# Altium PCB 窗帘机器人.PcbDoc
Units mm, origin at the board's own origin, x right, y up, seen from the top; angles counter-clockwise.
Board outline 82.23 x 28.09 mm, 2 copper layers (Top Layer, Bottom Layer); 57 components, 40 nets, 176 pads, 136 vias.
Unrouted connection lines stored in the file: 1.
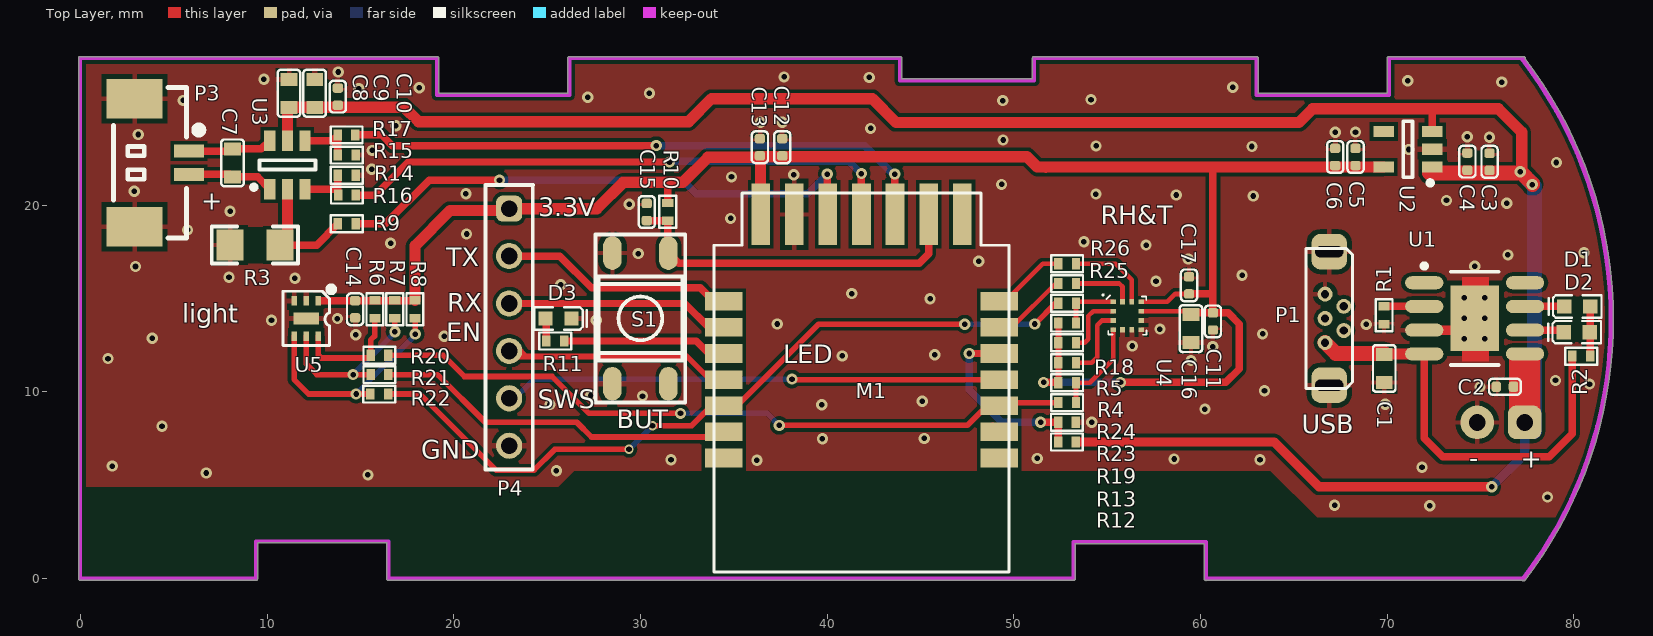
[diagram p0: Top Layer view]
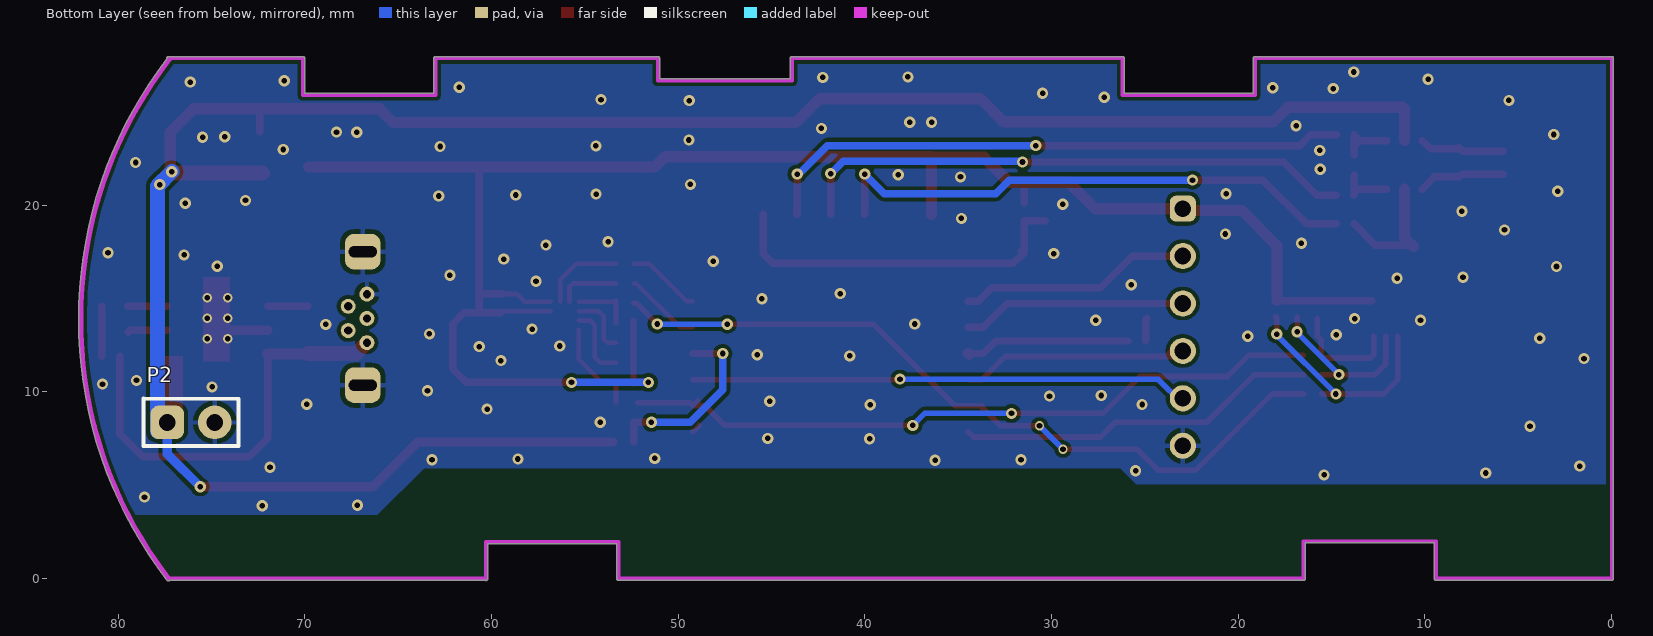
[diagram p1: Bottom Layer view, seen from below]
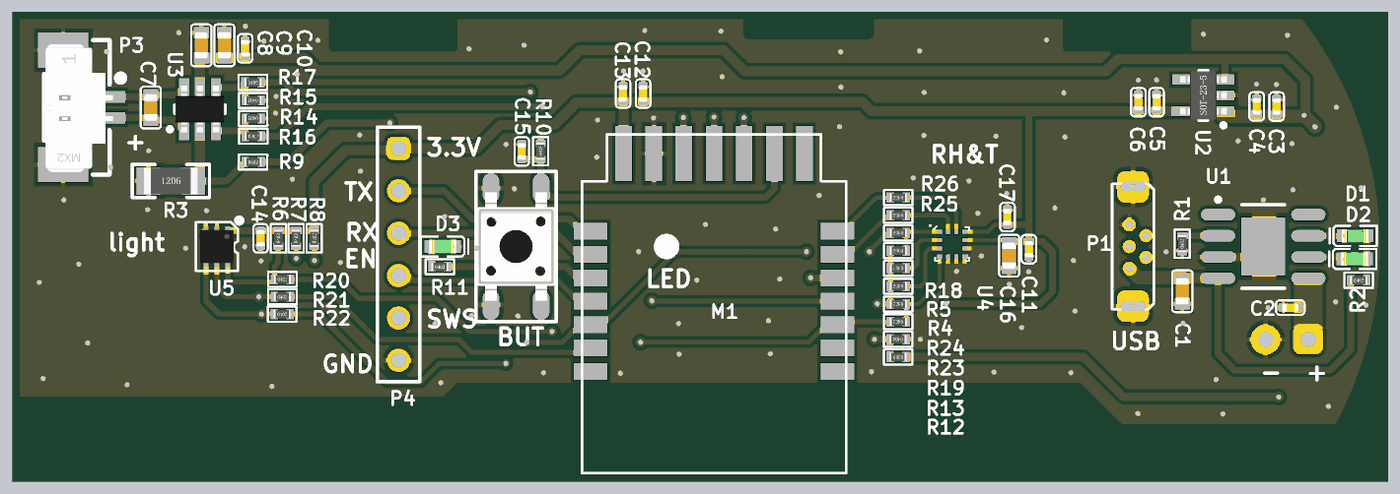
[diagram p2: 3D render of the assembled board from above, using the file's embedded part models]

## Layer stack, top to bottom
Top Solder: solder mask 0.0102, Solder Resist, Dk 3.5
Top Layer: signal copper 0.0356
Dielectric 1: dielectric 0.32, FR-4, Dk 4.8
Bottom Layer: signal copper 0.0356
Bottom Solder: solder mask 0.0102, Solder Resist, Dk 3.5

## Board outline
0,-0.1 cw(c0,0) -0.1,0 -0.1,27.86 cw(c0,27.86) 0,27.96 19.1,27.96 cw(c19.1,27.86) 19.2,27.86 19.2,26 26.1,26 26.1,27.86 cw(c26.2,27.86) 26.2,27.96 43.9,27.96 cw(c43.9,27.86) 44,27.86 44,26.76 51,26.76 51,27.86 cw(c51.1,27.86) 51.1,27.96 63,27.96 cw(c63,27.86) 63.1,27.86 63.1,26 70,26 70,27.86 cw(c70.1,27.86) 70.1,27.96 77.3,27.96 cw(c77.3,27.86) 77.4,27.86 cw(c77.3,27.86) 77.395,27.828 cw(c59.18,13.87) 82.128,13.87 cw(c59.18,13.87) 77.402,-0.078 cw(c77.301,-0.001) 77.222,-0.1 60.344,-0.1 cw(c60.3,-0.01) 60.2,-0.01 60.2,1.86 53.3,1.86 53.3,0 cw(c53.2,0) 53.2,-0.1 16.5,-0.1 cw(c16.5,0) 16.401,0.015 cw(c16.5,0.03) 16.4,0.03 16.4,1.9 9.5,1.9 9.5,0.04 cw(c9.4,0.04) 9.498,0.02 cw(c9.4,0) 9.5,0 cw(c9.4,0) 9.4,-0.1

## Design rules (kind name [scope] priority, off if disabled: settings)
Clearance [All] p1: gap=0.2
HoleToHoleClearance [All] p1: gap=0.2 allowstackedmicrovias=TRUE
PolygonConnect PolygonConnect_1 [IsVia] p1: connectstyle=Direct reliefconductorwidth=0.254 reliefentries=4 polygonreliefangle="90 Angle" airgapwidth=0.254
PolygonConnect [All] p2: connectstyle=Relief reliefconductorwidth=0.254 reliefentries=4 polygonreliefangle="90 Angle" airgapwidth=0.254
RoutingVias [All] p1: holewidth=0.3 width=0.5 viastyle="Through Hole" minholewidth=0.3 minwidth=0.5 maxholewidth=0.5 maxwidth=1
SilkToSilkClearance [All] p1: silktosilkclearance=0
SilkToSolderMaskClearance [IsPad] p1: minsilkscreentomaskgap=0 clearancetoexposedcopper=TRUE
SolderMaskExpansion [All] p1: expansion=0.051
Width [All] p1: maxlimit=1 minlimit=0.25 preferedwidth=0.254
27 further rules are at their usual default settings.

## Components (designator, comment, footprint, x,y, rotation, side; value= is the part's Value field where it differs from the comment)
C1 "1uF/16V" C0603_GRM18 69.85,11.25 r270 top
C2 "4.7uF/6.3V" C0402_GRM15 76.31,10.27 r0 top
C3 "10uF/6.3V" C0402_GRM15 75.49,22.32 r90 top
C4 "0.1uF/16V" C0402_GRM15 74.3,22.33 r270 top
C5 "10uF/6.3V" C0402_GRM15 68.31,22.58 r90 top
C6 "0.1uF/16V" C0402_GRM15 67.22,22.58 r270 top
C7 "0.1uF/50V" C0603_GRM18 8.15,22.26 r90 top
C8 "10uF/10V" C0603_GRM18 11.17,25.99 r270 top
C9 "10uF/10V" C0603_GRM18 12.55,25.99 r270 top
C10 "0.1uF/16V" C0402_GRM15 13.79,25.81 r270 top
C11 "0.1uF/16V" C0402_GRM15 60.67,13.77 r90 top
C12 "10uF/6.3V" C0402_GRM15 37.6,23.1 r90 top
C13 "0.1uF/16V" C0402_GRM15 36.4,23.1 r270 top
C14 "0.1uF/16V" C0402_GRM15 14.72,14.42 r90 top
C15 "0.1uF/16V" C0402_GRM15 30.34,19.63 r270 top
C16 "10uF/10V" C0603_GRM18 59.49,13.38 r90 top
C17 "0.1uF/16V" C0402_GRM15 59.39,15.7 r270 top
D1 "红光" LED0603 80.19,14.57 r180 top
D2 "绿光" LED0603 80.16,13.19 r180 top
D3 "蓝光" LED0603 25.61,13.93 r0 top
M1 "BTU" CBU-PCBA 41.84,13.55 r180 top
P1 "Value" MICROUSB_180 66.9,13.93 r90 top locked
P2 "电池" HDR1×2_2.54 77.37,8.36 r180 bottom
P3 "1.25T-2PLT" 1.25-2P-LT 4.36,22.27 r270 top
P4 "烧录日志" HDR1×6_2.54 22.97,13.46 r270 top
R1 "1k" R0402 69.84,14.1 r90 top
R2 "3.3K/1%" R0402 80.4,11.91 r0 top
R3 "0.1R" R1206 9.35,17.86 r0 top
R4 "10K" R0402 52.86,12.63 r180 top
R5 "10K" R0402 52.86,13.68 r180 top
R6 "10K" R0402 15.78,14.42 r90 top
R7 "10K" R0402 16.84,14.42 r90 top
R8 "10K" R0402 17.92,14.42 r90 top
R9 "1K/1%" R0402 14.27,19 r0 top
R10 "10K" R0402 31.47,19.64 r90 top
R11 "3.3K/1%" R0402 25.44,12.72 r0 top
R12 "47k/1%" R0402 52.85,7.31 r0 top
R13 "47k/1%" R0402 52.85,8.37 r180 top
R14 "100K" R0402 14.27,21.6 r180 top
R15 "100K" R0402 14.27,22.68 r180 top
R16 "1K/1%" R0402 14.28,20.54 r0 top
R17 "1K/1%" R0402 14.26,23.76 r0 top
R18 "100R" R0402 52.86,14.74 r180 top
R19 "100R" R0402 52.86,9.42 r180 top
R20 "100R" R0402 16.02,11.96 r0 top
R21 "100R" R0402 16.02,10.92 r0 top
R22 "100R" R0402 16.01,9.88 r0 top
R23 "10K" R0402 52.86,10.48 r180 top
R24 "10K" R0402 52.86,11.55 r180 top
R25 "100R" R0402 52.86,15.8 r180 top
R26 "100R" R0402 52.86,16.86 r180 top
S1 "TSTP4560-250BH-6.5（DP)" SW-PB4_SMT_2 30,13.93 r90 top locked
U1 "XT2052" ESOP-8 74.69,13.935 r0 top
U2 "TLV70328DBVR" SOT23-5 71.11,22.99 r180 top
U3 "HT7K1201" SOT23-6 11.09,22.16 r90 top
U4 "LIS2DW12" LGA-12 56.08,14.07 r0 top
U5 "OPT3004" QFN-7 12.1,13.93 r270 top locked

## Footprints (in the part's own frame and the unit in brackets; to place one, negate y for a bottom-side part, rotate by r counter-clockwise, add the part's x,y. Pads: shape width x height; smd on the part's side, far side on the other; paste and mask are expansions set on the pad)
1.25-2P-LT [mm]
  rect 0.7x1.6 smd: 1(-0.625,1.45) 2(0.625,1.45)
  rect 2.1x3 smd: S1(-3.425,-1.45) S2(3.425,-1.45)
  silkscreen extent -4.03,-2.59 4.03,2.18, body extent -3.78,-2.5 3.87,1.6, height 4.7
C0402_GRM15 [mm] "适用Murata GRM15封装"
  rrect50% 0.508x0.55 smd paste+0 mask+0.051: 1(-0.46,0) 2(0.46,0)
  Top Layer pour cut-out: 0.864,-0.458 0.864,-0.152 0.48,-0.152 0.48,-0.457
  Top Layer pour cut-out: -0.152,0.432 0.152,0.432 0.152,-0.432 -0.152,-0.432
  Top Layer pour cut-out: 0.864,0.458 0.864,0.152 0.48,0.152 0.48,0.457
  Top Layer pour cut-out: -0.864,-0.458 -0.864,-0.152 -0.48,-0.152 -0.48,-0.457
  Top Layer pour cut-out: -0.864,0.458 -0.864,0.152 -0.48,0.152 -0.48,0.457
  silkscreen extent -0.85,-0.43 0.85,0.44, body extent -0.5,-0.25 0.5,0.25, height 0.5
C0603_GRM18 [mm] "适用Murata GRM15封装"
  rect 0.7x0.9 smd paste+0 mask+0.051: 1(-0.75,0) 2(0.75,0)
  Top Layer pour cut-out: -0.254,0.602 0.254,0.602 0.254,-0.602 -0.254,-0.602
  silkscreen extent -1.25,-0.6 1.25,0.6, body extent -0.8,-0.4 0.8,0.4, height 0.8
CBU-PCBA [mm]
  rect 2x1 smd mask+0.051: 1(-7.377,7.1) 2(-7.377,5.7) 3(-7.377,4.3) 4(-7.377,2.9) 5(-7.377,1.5) 6(-7.377,0.1) 7(-7.377,-1.3) 15(7.377,-1.3) 16(7.377,0.1) 17(7.377,1.5) 18(7.377,2.9) 19(7.377,4.3) 20(7.377,5.7) 21(7.377,7.1)
  rect 1x3.3 smd mask+0.051: 8(-5.4,-5.95) 9(-3.6,-5.95) 10(-1.8,-5.95) 11(0,-5.95) 12(1.8,-5.95) 13(3.6,-5.95) 14(5.4,-5.95)
  silkscreen extent -7.9,-7.1 7.9,13.2
ESOP-8 [mm]
  oval 2.05x0.7 smd: 1(-2.7,1.905) 2(-2.7,0.635) 3(-2.7,-0.635) 4(-2.7,-1.905) 5(2.7,-1.905) 6(2.7,-0.635) 7(2.7,0.635) 8(2.7,1.905)
  rect 2.6x3.5 smd: 9(0,0)
  silkscreen extent -2.82,-2.5 1.28,2.93
HDR1×2_2.54 [mm] "Connector; Header; 1x2 Position"
  rrect50% 1.8x1.8 hole 0.9: 1(0,0)
  round 1.8 hole 0.9: 2(2.54,0)
  silkscreen extent -1.27,-1.27 3.82,1.27
HDR1×6_2.54 [mm] "Connector; Header; 1x6 Position"
  rrect50% 1.4x1.4 hole 0.9: 1(-6.35,0)
  round 1.4 hole 0.9: 2(-3.81,0) 3(-1.27,0) 4(1.27,0) 5(3.81,0) 6(6.35,0)
  silkscreen extent -7.62,-1.27 7.63,1.27
LED0603 [mil]
  rect 30x30 smd: 1(-27.5,0) 2(27.5,0)
  Top Layer pour cut-out: -8,20 8,20 8,-20 -8,-20
  silkscreen extent -51,-24 60,24, body extent -31,-16 31,16, height 15
LGA-12 [mm]
  rect 0.3x0.25 smd mask+0.051: 1(-0.75,0.75) 2(-0.75,0.25) 3(-0.75,-0.25) 4(-0.75,-0.75) 7(0.75,-0.75) 8(0.75,-0.25) 9(0.75,0.25) 10(0.75,0.75)
  rect 0.25x0.3 smd mask+0.051: 5(-0.25,-0.75) 6(0.25,-0.75) 11(0.25,0.75) 12(-0.25,0.75)
  silkscreen extent -1.33,-1.02 1.03,1.15, body extent -1.02,-1.02 1.02,1.02, height 0.7
MICROUSB_180 [mm]
  round 0.8 hole 0.44: 1(-1.3,0.22) 2(-0.65,-0.78) 3(0,0.22) 4(0.65,-0.78) 5(1.3,0.22)
  rrect50% 1.9x1.9 hole 0.6 slot 1.5 at 90 deg: 5(-3.575,0) 5(3.575,0)
  silkscreen extent -3.75,-1.25 3.75,1.25
QFN-7 [mm]
  rect 0.5x0.3 smd mask+0.051: 1(-0.95,0.65) 2(-0.95,0) 3(-0.95,-0.65) 4(0.95,-0.65) 5(0.95,0) 6(0.95,0.65)
  rect 0.65x1.35 smd mask+0.051: 7(0,0)
  silkscreen extent -1.72,-1.25 1.45,1.5, body extent -1,-1 1,1, height 0.75
R0402 [mm]
  rect 0.45x0.6 smd paste+0 mask+0.051: 1(-0.475,0) 2(0.475,0)
  Top Layer pour cut-out: -0.189,-0.453 -0.189,0.452 0.19,0.452 0.19,-0.453
  Top Layer pour cut-out: 0.889,0.178 0.889,0.483 0.509,0.483 0.509,0.178
  Top Layer pour cut-out: 0.889,-0.178 0.889,-0.483 0.509,-0.483 0.509,-0.178
  Top Layer pour cut-out: -0.889,0.178 -0.889,0.483 -0.509,0.483 -0.509,0.178
  Top Layer pour cut-out: -0.889,-0.178 -0.889,-0.483 -0.509,-0.483 -0.509,-0.178
  silkscreen extent -0.85,-0.45 0.85,0.45, body extent -0.5,-0.25 0.5,0.25, height 0.35
R1206 [mil]
  rect 57x65 smd mask+2: 1(-52.5,0) 2(52.5,0)
  Top Layer pour cut-out: -37.4,-39 -37.4,39 37.4,39 37.4,-39
  silkscreen extent -91,-39 91,39, body extent -63,-31 63,32, height 24
SOT23-5 [mm] "SOT23-5"
  rect 1.1x0.6 smd mask+0.051: 1(-1.3,0.95) 2(-1.3,0) 3(-1.3,-0.95) 4(1.3,-0.95) 5(1.3,0.95)
  silkscreen extent -1.33,-1.5 0.25,1.92, body extent -1.4,-1.45 1.4,1.45, height 1.2
SOT23-6 [mm] "SOT23-6"
  rect 1.1x0.6 smd: 1(-1.3,0.95) 2(-1.3,0) 3(-1.3,-0.95) 4(1.3,-0.95) 5(1.3,0) 6(1.3,0.95)
  silkscreen extent -1.32,-1.5 0.25,1.92, body extent -1.4,-1.45 1.4,1.45, height 1.2
SW-PB4_SMT_2 [mm] "4.5*4.5*6（L*W*H）"
  oval 1.8x1 smd: 1(-3.5,1.5) 2(3.5,1.5) 3(-3.5,-1.5) 4(3.5,-1.5)
  silkscreen extent -4.5,-2.4 4.5,2.4, body extent -3.25,-2.25 3.25,2.25, height 6.15

## Part data
C1: library part 1.02.03.00181, "无极性电容"
C2: library part 1.02.05.00431, "无极性电容"
C3 C5 C12: library part 1.02.05.00103, "无极性电容"
C4 C6 C10 C11 C13 C14 C15 C17: library part 1.02.05.00130, "无极性电容"
C7: library part 1.02.05.00150, "无极性电容"
C8 C9 C16: library part 1.02.99.00007, "无极性电容"
D1 D2 D3: library part 1.06.02.00449, "LED"
M1: "泰凌微 8250 蓝牙"
P1: library part MicroUSB-B, "MicroUSB-B"
P2: library part "Header 2×1", "单排2pin"
P3: library part 1.16.09.00255
P4: library part "Header 6×1", "单排6pin"
R1: library part 1.01.01.00764, "电阻"
R2 R11: library part 1.01.01.00234, "电阻"
R3: library part 1.01.01.01077, "电阻"
R4 R5 R6 R7 R8 R10 R23 R24: library part 1.01.01.00439, "电阻"
R9 R16 R17: library part 1.01.01.01230, "电阻"
R12 R13: library part 1.01.01.00774, "电阻"
R14 R15: library part 1.01.01.00990, "电阻"
R18 R19 R20 R21 R22 R25 R26: library part 1.01.01.00840, "电阻"
S1: library part 1.13.04.00023, "4pin轻触开关（无固定脚）"
U1: "南麟 锂电池充电芯片"
U2: library part 1.15.03.00007
U3: "电机驱动芯片"
U4: library part 1.15.15.00018
U5: library part 1.15.15.00040

## Free pads (board coordinates)
  round 1.524 on Top Overlay: 0(39,13.93)

## Via types
v1: diameter 0.6, hole 0.3, Top Layer to Bottom Layer, tented both sides, 128 vias
v2: diameter 0.5, hole 0.3, Top Layer to Bottom Layer, tented both sides, 8 vias

## Nets (pads, with @x,y where several pads share a name; then routed paths per layer and width w, separated by ;. In a path a pad name is that pad's centre, name@x,y a point inside that pad or via, vN(x,y) a via of type N, cw(c..) or ccw(c..) an arc to the next point about the centre after c; other vN are vias at no path point)
3.3V: C5.1 C6.2 C11.2 C12.1 C13.2 C14.2 C16.2 C17.2 M1.14 P4.1 R4.2 R5.2 R6.2 R7.2 R8.2 R10.2 R23.2 R24.2 U2.5 U4.9 U4.10 U5.1 | length 101
  Top Layer w0.25: U4.9 59.34,14.32 59.49,14.17 C16.2@59.55,14.23 ; U4.10 58.23,14.82 58.65,15.24 C17.2 ; 60.67,21.99 60.72,22.04
  Top Layer w0.3: R23.2@52.355,10.66 52.395,10.7 R5.2@52.395,13.82
  Top Layer w0.4: U5.1@12.84,14.88 R8.2@17.895,14.88 ; R10.2 31.47,21.16 ; v1(51.6,10.5) 52.365,10.5 R23.2 ; v1(55.72,10.5) 61.36,10.5 62.08,11.22 62.08,13.63 61.48,14.23 C11.2 ; C17.2 60.64,15.24 60.67,15.21 ; C16.2@59.55,14.23 C11.2 ; 60.67,21.99 60.67,15.21 ; C11.2 60.67,15.21
  Top Layer w0.5: 51.72,21.98 51.78,22.04 ; 52.78,21.99 52.83,22.04
  Top Layer w0.6: R8.2 17.92,17.82 19.81,19.71 22.87,19.71 P4.1 27.67,19.81 29.08,21.22 32.27,21.22 33.61,22.56 C13.2@36.43,22.56 ; M1.14 36.43,19.51 C13.2@36.43,22.56 ; C13.2@36.47,22.56 C13.2@36.43,22.56 ; U2.5 60.72,22.04 52.83,22.04 51.78,22.04 51.26,22.04 50.71,22.59 36.43,22.59 C13.2@36.43,22.56
  Bottom Layer w0.4: v1(51.6,10.5) v1(55.72,10.5)
FWD: R14.2 R16.1 U3.3 | length 2.8
  Top Layer w0.4: U3.3 13.785,20.86 13.795,20.87 ; R14.2 13.795,20.87 ; R16.1 13.795,20.55 13.795,20.87
GND: C1.2 C2.1 C3.2 C4.1 C5.2 C6.1 C8.1 C9.1 C10.1 C11.1 C12.2 C13.1 C14.1 C15.1 C16.1 C17.1 D3.2 M1.13 P1.5 P2.2 P3.S1 P3.S2 P4.6 R1.1 R3.1 R13.1 R14.1 R15.1 S1.1 S1.2 U1.3 U1.9 U2.2 U4.5 U4.6 U4.7 U4.8 U5.2 U5.3 U5.7 | length 3
  Top Layer w0.5: U1.3 74.055,13.3 U1.9
  other v1: 67.19,3.92 72.28,3.9 78.59,4.36 15.4,5.55 6.74,5.65 25.5,5.77 71.87,5.96 1.71,6.02 36.24,6.33 31.64,6.36 63.19,6.36 58.59,6.4 51.26,6.43 39.75,7.48 45.21,7.5 4.37,8.15 54.18,8.37 60.24,9.07 25.15,9.32 39.72,9.31 69.9,9.33 45.1,9.49 30.11,9.77 27.34,9.8 63.43,10.06 74.97,10.26 80.84,10.41 79.02,10.61 59.5,11.67 1.48,11.78 40.81,11.92 45.77,11.98 60.66,12.42 56.35,12.45 3.85,12.87 19.49,12.97 14.75,13.06 63.33,13.1 57.83,13.36 68.88,13.61 37.33,13.63 10.24,13.83 27.63,13.83 13.77,13.92 45.52,14.98 41.32,15.26 25.73,15.73 57.62,15.92 11.49,16.08 7.96,16.14 62.23,16.24 2.95,16.71 74.7,16.72 48.13,16.99 59.35,17.11 76.47,17.33 29.89,17.4 80.55,17.45 57.09,17.86 16.62,17.96 53.76,18.04 20.69,18.45 5.74,18.67 34.83,19.29 8.02,19.67 29.4,20.05 76.41,20.1 73.18,20.25 62.83,20.49 58.71,20.54 20.65,20.61 54.4,20.59 2.89,20.74 49.35,21.11 34.88,21.51 38.22,21.63 15.61,21.92 79.07,22.28 15.64,22.93 71.16,22.98 62.76,23.14 54.41,23.17 49.43,23.49 74.29,23.66 75.48,23.64 3.1,23.78 67.22,23.9 68.31,23.91 42.33,24.11 16.9,24.25 36.43,24.44 37.6,24.44 5.5,25.61 49.41,25.6 54.14,25.65 27.18,25.78 30.48,25.99 14.91,26.24 18.15,26.29 61.73,26.31 76.14,26.59 71.11,26.66 9.83,26.74 42.26,26.84 37.7,26.87 13.81,27.13
  other v2: 74.14,12.835 75.24,12.835 74.14,13.935 75.24,13.935 74.14,15.035 75.24,15.035
INT1: R25.1 U4.12 | length 3.4
  Top Layer w0.25: R25.1 55.65,15.8 55.83,15.62 U4.12
INT2: R26.1 U4.11 | length 4.5
  Top Layer w0.25: R26.1 55.46,16.86 56.33,15.99 U4.11
KEY: C15.2 M1.9 R10.1 S1.3 S1.4 | length 19.5
  Top Layer w0.4: C15.2 31.465,19.17 R10.1 31.47,17.46 S1.4 ; S1.4@31.62,17.55 S1.4 ; M1.9 45.44,17.39 44.93,16.88 32.05,16.88 S1.4
LED: M1.17 R11.2 | length 8.9
  Top Layer w0.4: R11.2 32.99,12.72 33.66,12.05 M1.17
  Top Layer w0.6: M1.17@34.423,12.01 M1.17
MO_CUR: R3.2 R9.1 U3.2 | length 6.8
  Top Layer w0.4: R3.2 10.693,17.86 12.655,17.86 R9.1
  Top Layer w0.6: R3.2@10.623,17.79 10.693,17.86 11.09,18.257 U3.2
NetD1_1: D1.1 D2.1 R2.2 | length 2.7
  Top Layer w0.4: R2.2 80.875,14.556 D1.1
NetD1_2: D1.2 U1.7 | length 2.1
  Top Layer w0.4: U1.7 D1.2
NetD2_2: D2.2 U1.6 | length 2.1
  Top Layer w0.4: U1.6 79.351,13.3 D2.2
NetD3_1: D3.1 R11.1 | length 1.2
  Top Layer w0.4: D3.1 24.965,13.877 R11.1
NetM1_10: M1.10 R17.2 | length 31.9
  Top Layer w0.4: R17.2 16.13,23.76 16.7,23.19 v1(30.85,23.19) ; v1(43.63,21.66) 43.63,19.51 M1.10
  Bottom Layer w0.4: v1(30.85,23.19) 42.01,23.19 43.54,21.66 v1(43.63,21.66)
NetM1_11: M1.11 R16.2 | length 30.3
  Top Layer w0.4: R16.2 15.8,20.54 17.57,22.31 v1(31.56,22.31) ; M1.11 v1(41.84,21.69)
  Bottom Layer w0.4: v1(31.56,22.31) 31.61,22.36 41.17,22.36 v1(41.84,21.69)
NetM1_12: M1.12 R9.2 | length 29.1
  Top Layer w0.4: R9.2 16.34,19 18.68,21.34 v1(22.45,21.34) ; v1(40.01,21.66) 40.01,19.53 M1.12
  Bottom Layer w0.4: v1(22.45,21.34) 32.27,21.34 33,20.61 38.96,20.61 v1(40.01,21.66)
NetR1_2: R1.2 U1.2 | length 2.2
  Top Layer w0.4: R1.2 69.845,14.57 U1.2
NetR4_1: R4.1 U4.2 | length 3.4
  Top Layer w0.25: R4.1 53.8,12.63 53.99,12.82 53.99,14.06 54.25,14.32 U4.2
NetR24_1: R24.1 U4.3 | length 3.9
  Top Layer w0.25: R24.1 54.18,11.55 54.47,11.84 54.47,13.56 54.73,13.82 U4.3
OP_INT: R7.1 R21.1 U5.5 | length 9.2
  Top Layer w0.3: U5.5 12.1,11.49 12.67,10.92 v1(14.61,10.92) R21.1 ; v1(16.85,13.22) R7.1@16.85,14.01
  Bottom Layer w0.3: v1@14.6,10.92 16.85,13.17 v1(16.85,13.22) ; v1@14.6,11.03 v1@14.61,11.02
OP_SCL: R8.1 R22.1 U5.4 | length 12.4
  Top Layer w0.3: U5.4 11.45,10.66 12.23,9.88 v1(14.77,9.88) R22.1 ; R8.1@17.92,13.87 R8.1@17.94,13.89 ; v1(17.94,13.09) R8.1@17.94,13.89 ; R8.1@17.96,13.91 R8.1@17.94,13.89 ; R8.1@17.99,14.03 17.94,13.98 R8.1@17.94,13.89
  Bottom Layer w0.3: v1@14.77,9.981 v1(14.77,9.88) 17.94,13.05 v1(17.94,13.09)
OP_SDA: R6.1 R20.1 U5.6 | length 5.9
  Top Layer w0.3: U5.6 12.75,11.97 12.91,11.81 R20.1@15.511,11.81 ; R20.1 15.545,12.765 15.76,12.98 R6.1@15.76,13.92
PA0: M1.6 R25.2 | length 4.1
  Top Layer w0.25: M1.6 49.9,13.45 52.25,15.8 R25.2
PA1: M1.7 R26.2 | length 4
  Top Layer w0.25: M1.7 49.54,14.85 51.55,16.86 R26.2
PC0: M1.3 R19.2 R20.2 | length 38.1
  Top Layer w0.3: R20.2@16.52,11.96 19.43,11.96 20.57,10.82 25.27,10.82 27.25,8.84 v1(32.15,8.84) ; v1(37.44,8.2) 47.507,8.2 48.557,9.25 M1.3 ; M1.3@48.947,9.52 M1.3 ; 52.155,9.42 49.387,9.42 M1.3
  Bottom Layer w0.3: v1(32.15,8.84) 36.8,8.84 v1(37.44,8.2)
PC1: M1.19 R18.2 R22.2 | length 41.4
  Top Layer w0.3: R22.2 18.19,9.88 22.27,5.8 24.3,5.8 25.42,6.92 v2(29.39,6.92) ; v2(30.65,8.18) 32.74,8.18 M1.19@33.81,9.25 ; M1.19@33.75,9.25 M1.19@33.81,9.25 ; v1(47.37,13.62) 39.54,13.62 35.17,9.25 M1.19 M1.19@33.81,9.25 ; v1(51.13,13.63) 52.24,14.74 R18.2
  Bottom Layer w0.3: v2(29.39,6.92) v2(30.65,8.18) ; v1(47.37,13.62) 51.12,13.62 v1(51.13,13.63)
PD3: M1.1
PD4: M1.20 R21.2 | length 19.5
  Top Layer w0.3: R21.2 19.14,10.92 21.69,8.37 26.59,8.37 27.38,7.58 34.193,7.58 M1.20
PD7: M1.2 | length 0.5
  Top Layer w0.3: M1.2@48.867,8.2 M1.2
REV: R15.2 R17.1 U3.4 | length 3.4
  Top Layer w0.4: U3.4 13.485,23.46 ; R17.1 R17.1@13.775,23.75 ; R15.2 13.795,23.15 ; 13.485,23.46 13.795,23.15 ; 13.485,23.46 R17.1@13.775,23.75 ; R17.1@13.775,23.75 13.795,23.73 13.795,23.15
RH_SCL: R5.1 R18.1 U4.1 | length 3.2
  Top Layer w0.25: R5.1 53.335,14.75 R18.1@53.405,14.82 ; R18.1@53.335,14.89 R18.1@53.405,14.82 ; U4.1 R18.1@53.405,14.82
RH_SDA: R19.1 R23.1 U4.4 | length 5.2
  Top Layer w0.25: R19.1 R23.1 54.07,10.48 55.33,11.74 U4.4
RST: M1.18 P4.4 | length 13.2
  Top Layer w0.3: M1.18 33.73,10.65 32.49,11.89 23.88,11.89 ; 23.88,11.89 23.58,12.19 P4.4 23.27,11.89 23.88,11.89
RX: M1.16 P4.3 | length 12.5
  Top Layer w0.4: P4.3 32.38,14.73 33.66,13.45 M1.16 ; P4.3@22.99,14.45 P4.3@23.42,14.45
SWS: M1.4 P4.5 | length 26.8
  Top Layer w0.3: v1@38.14,10.65 M1.4
  Bottom Layer w0.3: P4.5@22.99,9.37 24.29,10.67 ; 24.36,10.68 24.35,10.67 ; v1(38.12,10.68) 38.11,10.67 24.35,10.67 ; 24.29,10.67 24.32,10.64 24.35,10.67 ; 24.29,10.67 24.35,10.67
TX: M1.15 P4.2 | length 12.5
  Top Layer w0.4: P4.2 25.69,17.27 27.38,15.58 33.2,15.58 33.93,14.85 M1.15
V+: C7.1 P3.2 U3.1 | length 4.7
  Top Layer w0.4: P3.2 8.015,21.645 C7.1 9.49,21.51 U3.1
V-: C7.2 P3.1 U3.6 | length 4.6
  Top Layer w0.4: P3.1 7.975,22.895 C7.2@8.15,23.07 ; C7.2 9.69,23.01 U3.6
VBAT: C2.2 C3.1 C4.2 C8.2 C9.2 C10.2 P2.1 R12.2 U1.5 U2.1 U2.3 U3.5 | length 120.7
  Top Layer w0.4: U2.3 72.41,25.14 72.43,25.16
  Top Layer w0.5: R12.2@53.51,7.31 63.95,7.31 66.35,4.91 v1(75.61,4.91)
  Top Layer w0.6: U3.5 11.09,25.16 C8.2 17.35,25.24 18.12,24.47 32.59,24.47 33.82,25.7 42.42,25.7 43.69,24.43 65.27,24.43 66,25.16 72.43,25.16 75.96,25.16 77.21,23.91 v1@77.21,21.72
  Top Layer w0.8: 72.28,21.72 77.21,21.72 77.78,21.15 v1(77.78,21.1)
  Bottom Layer w0.5: v1(75.61,4.91) 77.37,6.67 P2.1
  Bottom Layer w0.8: v1(77.13,21.79) 77.895,21.025 P2.1@77.895,7.875
VIN_5: C1.1 P1.1 R2.1 U1.4 | length 23.1
  Top Layer w0.4: U1.4 71.99,7.5 72.97,6.52 78.69,6.52 79.925,7.755 R2.1
  Top Layer w0.6: C1.1 69.88,12.03 U1.4
  Top Layer w0.8: P1.1 67.25,12.06 C1.1@69.87,12.06
VOL: M1.5 R12.1 R13.2 | length 10.1
  Top Layer w0.4: v1(47.62,12.05) M1.5 ; v1(51.44,8.37) R13.2 R12.1
  Bottom Layer w0.4: v1(47.62,12.05) 47.62,10.11 49.36,8.37 v1(51.44,8.37)
pads on no net: M1.8 M1.21 P1.2 P1.3 P1.4 U1.1 U1.8 U2.4

## Polygon pours and split planes (outlines as drawn)
GND on Bottom Layer "Top Layer-No Net" (solid, remove dead copper, pour order 0): 0,27.86 77.3,27.86 82.24,22.92 82.24,13.9 82.24,6.39 80.21,4.36 79.25,3.4 66.12,3.4 63.62,5.9 49.49,5.9 26.32,5.9 25.47,5.05 0,5.05
GND on Top Layer "Top Layer-No Net" (solid, remove dead copper, pour order 2): 0.127,27.733 77.427,27.733 82.367,22.793 82.367,13.773 82.367,6.263 80.337,4.233 79.377,3.273 66.247,3.273 63.747,5.773 49.617,5.773 26.447,5.773 25.597,4.923 0.127,4.923

## Keep-outs
Keep-Out Layer:
  lines w0.2: 9.4,0 0,0 0,27.86 19.1,27.86 19.1,25.9 26.2,25.9 26.2,27.86 43.9,27.86 43.9,26.66 51.1,26.66 51.1,27.86 63,27.86 63,25.9 70.1,25.9 70.1,27.86 77.3,27.86 ; 9.4,0.04 9.4,2 16.5,2 16.5,0.03 ; 16.5,0 53.2,0 53.2,1.96 60.3,1.96 60.3,-0.01 ; 60.3,0 77.3,0
  lines w0.254: 77.243,27.816 cw(c59.18,13.87) 77.301,-0.001

## Other copper
Top Layer:
  rectangle net GND: 74.02,11.63 75.46,16.16
  rectangle net VBAT: 76.52,8.17 78.23,11.92

## Silkscreen, mask and mechanical layers (free items; w line width, h text height)
Top Overlay:
  text "+" at 6.48,19.76 h1
  text "3.3V" at 24.52,19.4 h1
  text "RH&T" at 54.65,18.98 h1
  text "TX" at 19.6,16.73 h1
  text "RX" at 19.66,14.3 h1
  text "light" at 5.46,13.71 h1
  text "EN" at 19.6,12.72 h1
  text "LED" at 37.64,11.52 h1
  text "SWS" at 24.5,9.11 h1
  text "BUT" at 28.74,8.04 h1
  text "USB" at 65.43,7.79 h1
  text "GND" at 18.27,6.42 h1
  text "-" at 74.41,5.95 h1
  text "+" at 77.15,5.93 h1
Top Solder:
  rectangle: 11.32,15.13 11.59,15.39
  rectangle: 11.97,15.1 12.24,15.4
  rectangle: 11.16,13.8 13.03,14.06
  rectangle: 55.71,12.91 55.95,13.14
  rectangle: 56.21,12.9 56.45,13.13
  rectangle: 56.71,12.91 56.95,13.15
  rectangle: 57.02,13.7 57.24,13.94
  rectangle: 55.21,12.9 55.45,13.17
  rectangle: 54.88,13.7 55.29,13.94
  rectangle: 54.87,14.2 55.28,14.44
  rectangle: 54.87,14.7 55.28,14.94
  region: 55.95,14.87 55.95,15.28 55.71,15.28 55.71,14.87
  region: 56.45,14.87 56.45,15.28 56.21,15.28 56.21,14.87
  region: 57.31,14.94 56.9,14.94 56.9,14.7 57.31,14.7
  region: 57.3,14.44 56.89,14.44 56.89,14.2 57.3,14.2
  region: 13.24,15.07 12.82,15.07 12.82,14.71 13.24,14.71
  region: 12.61,12.78 12.61,12.31 12.89,12.31 12.89,12.78
  region: 11.96,12.73 11.96,12.26 12.24,12.26 12.24,12.73
  region: 11.31,12.73 11.31,12.26 11.59,12.26 11.59,12.73